# Altium PCB BuckConverterDesign.PcbDoc
Units mm, origin at the board's own origin, x right, y up, seen from the top; angles counter-clockwise.
Board outline 81 x 35 mm, 4 copper layers (Top Layer, IN-1, IN-2, Bottom Layer), stack 0.603 mm thick; 56 components, 37 nets, 210 pads, 46 vias.
Unrouted connection lines stored in the file: 125.
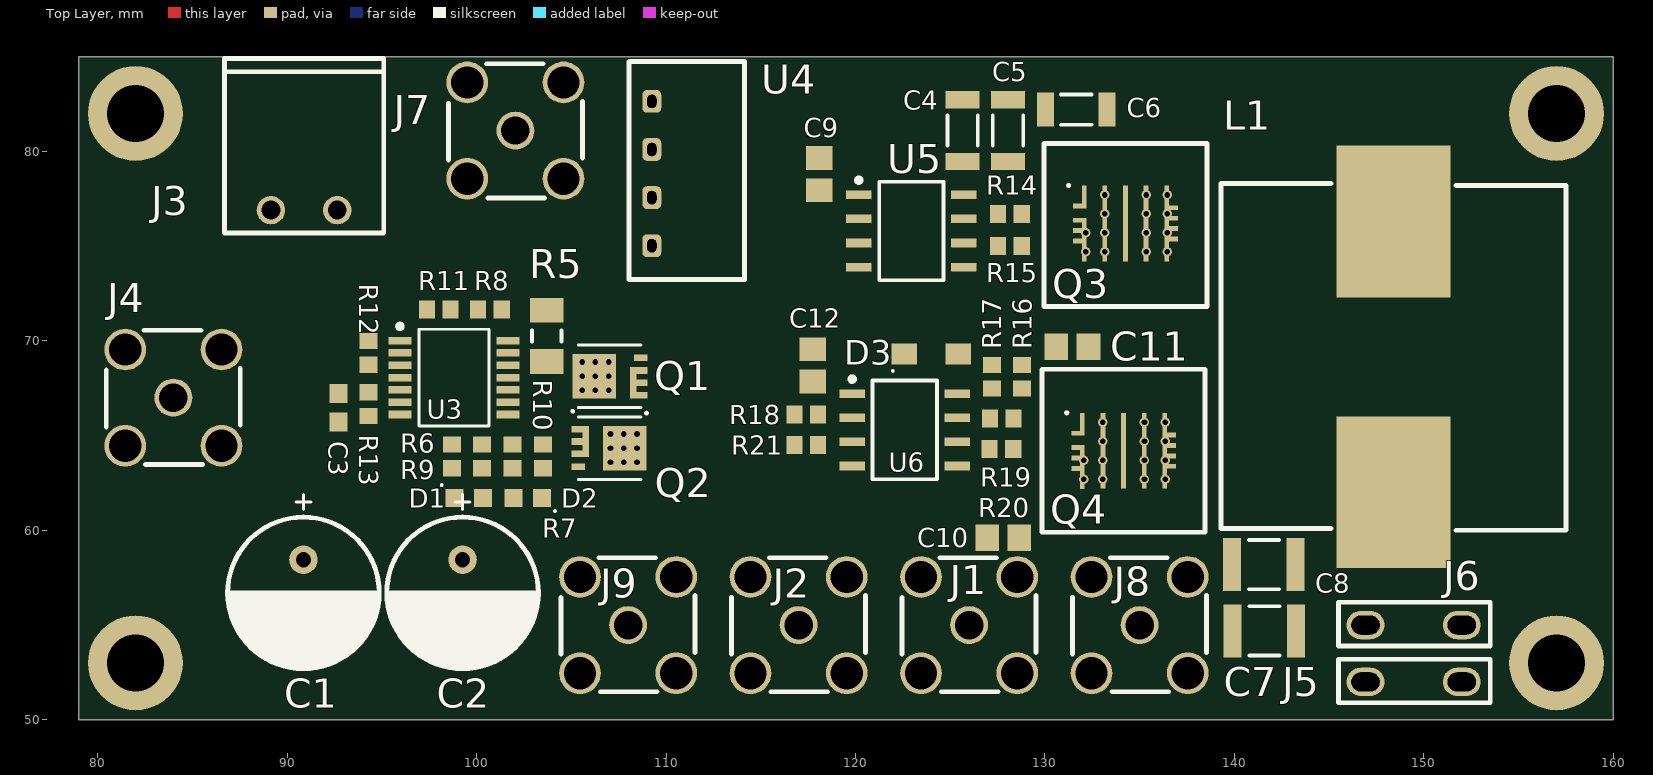
[diagram p0: Top Layer view]
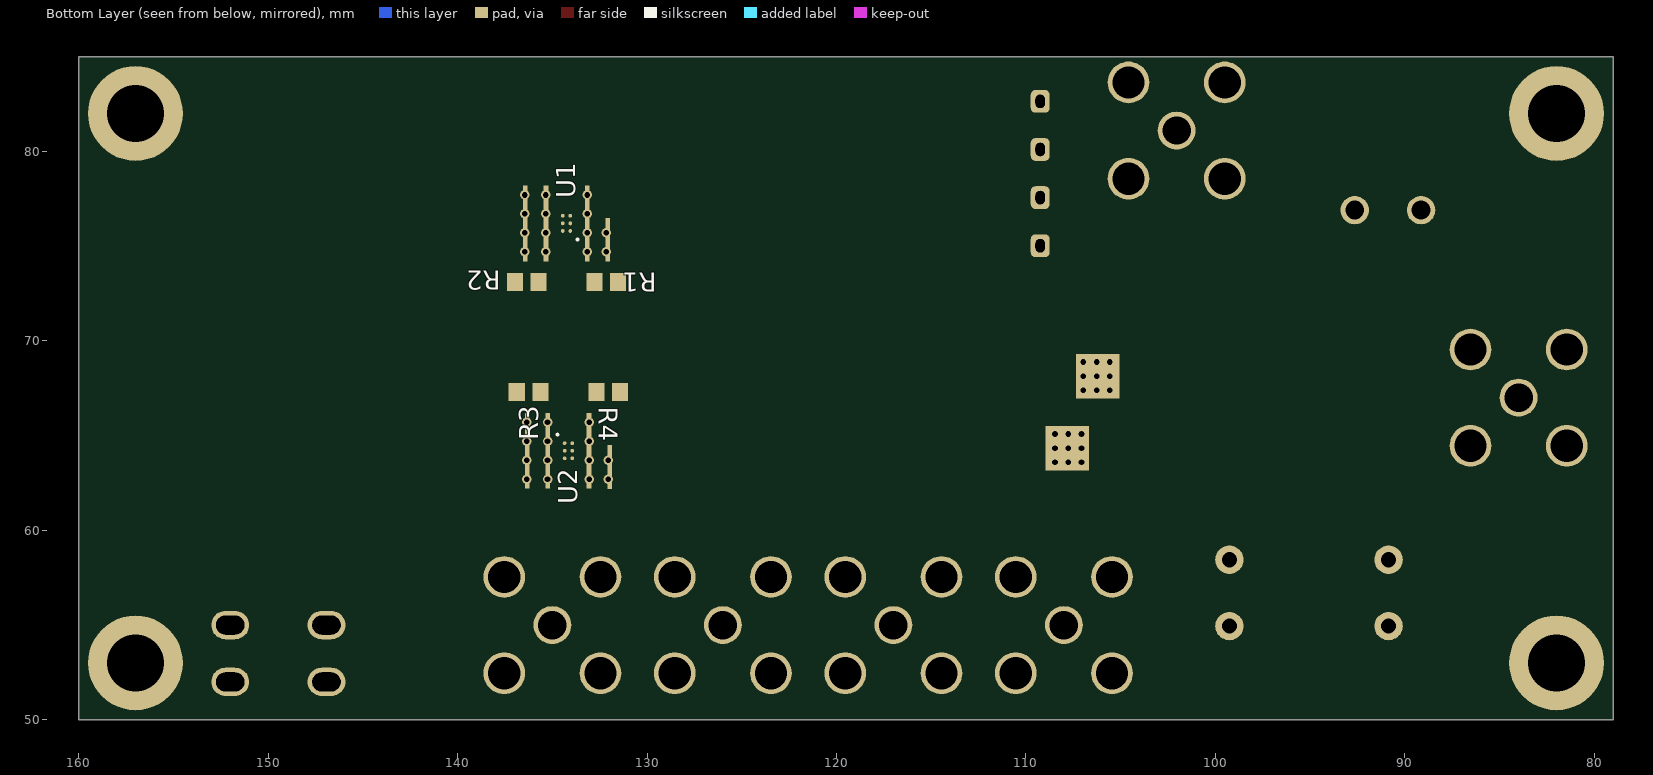
[diagram p1: Bottom Layer view, seen from below]

## Layer stack, top to bottom
Top Solder: solder mask 0.0102, Solder Resist, Dk 3.5
Top Layer: signal copper 0.035
Dielectric 2: prepreg 0.0711, PP-006, Dk 4.1
IN-1: signal copper 0.0356
Dielectric 1: dielectric 0.32, FR-4, Dk 4.8
IN-2: signal copper 0.0356
Dielectric 3: prepreg 0.0711, PP-006, Dk 4.1
Bottom Layer: signal copper 0.035
Bottom Solder: solder mask 0.0102, Solder Resist, Dk 3.5

## Board outline
79,50 160,50 160,85 79,85

## Design rules (kind name [scope] priority, off if disabled: settings)
AssemblyTestPointUsage [All] p1: isadvanced=TRUE
AssemblyTestpoint [All] p1: isadvanced=TRUE testpointundercomponent=TRUE minsize=1.016 maxsize=2.54 preferedsize=1.524 minholesize=0 maxholesize=1.016 preferedholesize=0.813 testpointgrid=0.025 usegrid=TRUE gridtolerance=0 allowsidetop=TRUE allowsidebottom=TRUE
Clearance Clearance_1 [All] p1: isadvanced=TRUE gap=0.15 ignorepadtopadclearanceinfootprint=FALSE
Clearance [All] p2: gap=0.254 ignorepadtopadclearanceinfootprint=FALSE ismatrix=TRUE
ComponentClearance [All] p1: isadvanced=TRUE gap=0.254 collisioncheckmode=3 verticalgap=0.254 showdistances=FALSE
FabricationTestPointUsage [All] p1: isadvanced=TRUE valid=0 allowmultiple=FALSE
FabricationTestpoint [All] p1: isadvanced=TRUE side=3 testpointundercomponent=TRUE minsize=1.016 maxsize=2.54 preferedsize=1.524 minholesize=0 maxholesize=1.016 preferedholesize=0.813 testpointgrid=0.025 allowsidetop=TRUE allowsidebottom=TRUE usegrid=TRUE gridtolerance=0
FanoutControl Fanout_BGA [IsBGA] p1: isadvanced=TRUE bgadir=Out bgaviamode=Centered fanoutstyle=Auto fanoutdirection=Alternating viagrid=0.025 // Fanout_BGA (Default Rule)
FanoutControl Fanout_LCC [IsLCC] p2: isadvanced=TRUE bgadir=Out bgaviamode=Centered fanoutstyle=Auto fanoutdirection=Alternating viagrid=0.025 // Fanout_LCC (Default Rule)
FanoutControl Fanout_SOIC [IsSOIC] p3: isadvanced=TRUE bgadir=Out bgaviamode=Centered fanoutstyle=Auto fanoutdirection=Alternating viagrid=0.025 // Fanout_SOIC (Default Rule)
FanoutControl Fanout_Small [(CompPinCount < 5)] p4: isadvanced=TRUE bgadir=Out bgaviamode=Centered fanoutstyle=Auto fanoutdirection=OutThenIn viagrid=0.025 // Fanout_Small (Default Rule)
FanoutControl Fanout_Default [All] p5: isadvanced=TRUE bgadir=Out bgaviamode=Centered fanoutstyle=Auto fanoutdirection=Alternating viagrid=0.025 // Fanout_Default (Default Rule)
Height [All] p1: isadvanced=TRUE minheight=0 maxheight=25.4 prefheight=12.7
HoleSize [All] p1: isadvanced=TRUE absolutevalues=TRUE maxlimit=20 minlimit=0.3 maxpercent=80.000 minpercent=20.000
HoleToHoleClearance [All] p1: isadvanced=TRUE gap=0.3 allowstackedmicrovias=TRUE
LayerPairs [All] p1: isadvanced=TRUE enforce=TRUE
MinimumSolderMaskSliver [All] p1: isadvanced=TRUE minsoldermaskwidth=0.15
NetAntennae [All] p1: isadvanced=TRUE netantennaetolerance=0
PasteMaskExpansion [All] p1: isadvanced=TRUE expansion=0.1 thpadusetoppaste=TRUE thpadusebottompaste=TRUE
PlaneClearance [All] p1: isadvanced=TRUE clearance=0.508
PlaneConnect [All] p1: isadvanced=TRUE planeconnectstyle=Relief reliefexpansion=0.508 reliefentries=4 reliefconductorwidth=0.254 reliefairgap=0.254
PolygonConnect PolygonConnect_5 [All vs IsNamedPolygon('SW_NODE_L01_P000')] p1: connectstyle=Direct reliefconductorwidth=0.254 reliefentries=4 polygonreliefangle="90 Angle" airgapwidth=0.254
PolygonConnect PolygonConnect_4 [All vs IsNamedPolygon('SW_NODE_L01_P000')] p2: connectstyle=Direct reliefconductorwidth=0.254 reliefentries=4 polygonreliefangle="90 Angle" airgapwidth=0.254
PolygonConnect PolygonConnect_3 [All vs IsNamedPolygon('NONET_L01_P000')] p3: thpad.connectstyle=Direct thpad.reliefconductorwidth=0.254 thpad.reliefentries=4 thpad.polygonreliefangle="90 Angle" thpad.airgapwidth=0.254 smdpad.connectstyle=Direct smdpad.reliefconductorwidth=0.254 smdpad.reliefentries=4 smdpad.polygonreliefangle="90 Angle" smdpad.airgapwidth=0.254 via.connectstyle=Relief via.reliefconductorwidth=0.254 via.reliefentries=4 via.polygonreliefangle="90 Angle" via.airgapwidth=0.254
PolygonConnect PolygonConnect_2 [All vs IsNamedPolygon('NONET_L01_P000')] p4: thpad.connectstyle=Direct thpad.reliefconductorwidth=0.254 thpad.reliefentries=4 thpad.polygonreliefangle="90 Angle" thpad.airgapwidth=0.254 smdpad.connectstyle=Direct smdpad.reliefconductorwidth=0.254 smdpad.reliefentries=4 smdpad.polygonreliefangle="90 Angle" smdpad.airgapwidth=0.254 via.connectstyle=Relief via.reliefconductorwidth=0.254 via.reliefentries=4 via.polygonreliefangle="90 Angle" via.airgapwidth=0.254
PolygonConnect PolygonConnect_1 [All vs IsNamedPolygon('NETQ3_1_L01_P001') Or IsNamedPolygon('NETQ4_1_L01_P002') Or IsNamedPolygon('NONET_L01_P000')] p5: connectstyle=Direct reliefconductorwidth=0.254 reliefentries=4 polygonreliefangle="90 Angle" airgapwidth=0.254
PolygonConnect [All] p6: connectstyle=Relief reliefconductorwidth=0.254 reliefentries=4 polygonreliefangle="90 Angle" airgapwidth=0.254
RoutingCorners [All] p1: isadvanced=TRUE cornerstyle=45-Degree minsetback=2.54 maxsetback=2.54
RoutingPriority [All] p1: isadvanced=TRUE routingpriority=0
RoutingTopology RoutingTopology_1 [All] p1: isadvanced=TRUE topology=Daisy_Balanced
RoutingVias RoutingViaStyle_1 [All] p1: isadvanced=TRUE holewidth=0.3 width=0.5 viastyle="Through Hole" minholewidth=0.3 minwidth=0.5 maxholewidth=10 maxwidth=20
RoutingVias [All] p2: holewidth=0.711 width=1.27 viastyle="Through Hole" minholewidth=0.711 minwidth=1.27 maxholewidth=0.711 maxwidth=1.27
ShortCircuit [All] p1: isadvanced=TRUE allowed=FALSE
SilkToSilkClearance [All] p1: isadvanced=TRUE silktosilkclearance=0.15
SilkToSolderMaskClearance [IsPad] p1: isadvanced=TRUE minsilkscreentomaskgap=0.15 clearancetoexposedcopper=TRUE
SolderMaskExpansion [All] p1: isadvanced=TRUE expansion=0.102 istentingtop=TRUE
SupplyNets "Schematic Supply Nets" [InNet('PGND')] p1: voltage=0.000
SupplyNets "Schematic Supply Nets_12" [InNet('3V3')] p2: voltage=0.000
SupplyNets "Schematic Supply Nets_11" [InNet('VIN')] p3: voltage=0.000
SupplyNets "Schematic Supply Nets_10" [InNet('OUT')] p4: voltage=0.000
SupplyNets "Schematic Supply Nets_9" [InNet('5V')] p5: voltage=0.000
SupplyNets "Schematic Supply Nets_2" [InNet('GND')] p6: voltage=0.000
SupplyNets "Schematic Supply Nets_1" [InNet('SW Node')] p7: voltage=0.000
UnRoutedNet [All] p1: isadvanced=TRUE
UnpouredPolygon [All] p1 off: isadvanced=TRUE
Width MaxMinWidth_1 [All] p1: isadvanced=TRUE maxlimit=10 minlimit=0.15 preferedwidth=0.3 minimp=50.000000 maximp=50.000000 favimp=50.000000
3 further rules are at their usual default settings.

## Classes and differential pairs
component class [03]GateDriver: C9 C10 C11 C12 D3 J7 J8 J9 R14 R15 R16 R17 R18 R19 R20 R21 U4 U5 U6
component class [06]TemperatureSense: J1 J2 R1 R2 R3 R4 U1 U2
component class [05]BuckConverter: C4 C5 C6 C7 C8 J5 J6 L1 Q3 Q4
component class [02]PowerProtections: C1 C2 C3 D1 D2 J3 J4 Q1 Q2 R5 R6 R7 R8 R9 R10 R11 R12 R13 U3

## Components (designator, comment, footprint, x,y, rotation, side; value= is the part's Value field where it differs from the comment)
C1 "AlPolTHT 100 µF 63V 0603 X7R ±10%" 107AVG063MFBJ 90.864,56.695 r270 top
C2 "AlPolTHT 100 µF 63V 0603 X7R ±10%" 107AVG063MFBJ 99.264,56.695 r270 top
C3 "CerSMD 10nF 16V 0603 X7R ±10%" CAPC1608X09N 92.708,66.463 r270 top
C4 "CerSMD 10µF 100V 1210 X6S ±10%" CAPC3216X18N 125.65,81.1 r270 top
C5 "CerSMD 10µF 100V 1210 X6S ±10%" CAPC3216X18N 128.05,81.1 r270 top
C6 "CerSMD 10µF 100V 1210 X6S ±10%" CAPC3216X18N 131.65,82.2 r0 top
C7 "CerSMD 3.3µF 100V 1210 X7S ±10%" CAPC3225X28N 141.585,54.69 r180 top
C8 "CerSMD 3.3µF 100V 1210 X7S ±10%" CAPC3225X28N 141.56,58.19 r180 top
C9 "CerSMD 100nF 16V 0805 X7R ±10%" CAPC2012X09N#1 118.1,78.8 r90 top
C10 "CerSMD 220nF 50V 0805 X7R ±10%" CAPC2012X09N#2 127.8,59.6 r180 top
C11 "CerSMD 2.2 µF 16V 0805 X7R ±10%" CAPC2012X09N#2 131.45,69.7 r0 top
C12 "CerSMD 100nF 16V 0805 X7R ±10%" CAPC2012X09N#2 117.75,68.7 r90 top
D1 "150060VS75000" LED1608X08N 99.6,61.7 r180 top
D2 "150060RS75000" LED1608X08N 102.7,61.7 r0 top
D3 "MBR1H100SFT3G" SODFL360X95-2N 124,69.3 r180 top
J1 "RF2-19A-T-00-50-G" RF2-19A-T-00-50-G#1 123.46,52.46 r0 top
J2 "RF2-19A-T-00-50-G" RF2-19A-T-00-50-G#2 114.46,52.46 r0 top
J3 "1844210" 1844210#1 86.7,75.7 r0 top
J4 "RF2-19A-T-00-50-G" RF2-19A-T-00-50-G#1 81.46,64.46 r0 top
J5 "726386-2" 1844210#2 152,52 r180 top
J6 "726386-2" 1844210#2 152,55 r180 top
J7 "RF2-19A-T-00-50-G" RF2-19A-T-00-50-G#1 104.59,83.64 r180 top
J8 "RF2-19A-T-00-50-G" RF2-19A-T-00-50-G#1 132.46,52.46 r0 top
J9 "RF2-19A-T-00-50-G" RF2-19A-T-00-50-G#1 105.46,52.46 r0 top
L1 "IndSMD Shielded 7.6 µH 20A 20.5 3.75 mOhm" 7443557760 139.3,60.1 r0 top
Q1 "BSZ040N06LS5ATMA1" PG-TSDSON-8-FL 108.671,66.486 r90 top
Q2 "BSZ040N06LS5ATMA1" PG-TSDSON-8-FL 105.371,65.986 r270 top
Q3 "IGC019S06S1XTMA1" IGC019S06S1XTMA1 131.75,77.7 r270 top
Q4 "IGC019S06S1XTMA1" IGC019S06S1XTMA1 131.65,65.7 r270 top
R1 "SMDRes 10K 0603 %1 0.1W" RESC1508X06N#1 132.15,73.1 r180 bottom
R2 "SMDRes 10K 0603 %1 0.1W" RESC1508X06N#1 136.35,73.1 r0 bottom
R3 "SMDRes 10K 0603 %1 0.1W" RESC1508X06N#1 136.25,67.3 r0 bottom
R4 "SMDRes 10K 0603 %1 0.1W" RESC1508X06N#1 132.05,67.3 r180 bottom
R5 "SMDRes 5 mOhm 1206 %1 1W" RESC3116X10N 103.708,70.263 r270 top
R6 "SMDRes 470K 0603 %1 0.1W" RESC1508X06N#1 100.3,63.9 r270 top
R7 "SMDRes 470K 0603 %1 0.1W" RESC1508X06N#1 101.9,63.9 r270 top
R8 "SMDRes 374K 0603 %1 0.1W" RESC1508X06N#1 100.708,71.663 r180 top
R9 "MDRes 330 Ohm 0603 %1 0.1W" RESC1508X06N#2 98.7,63.9 r270 top
R10 "SMDRes 330 Ohm 0603 %1 0.1W" RESC1508X06N#2 103.5,63.9 r270 top
R11 "SMDRes 1.82K 0603 %1 0.1W" RESC1508X06N#1 98.008,71.663 r0 top
R12 "SMDRes 47K 0603 %1 0.1W" RESC1508X06N#1 94.308,69.363 r90 top
R13 "SMDRes 10K 0603 %1 0.1W" RESC1508X06N#1 94.308,66.663 r270 top
R14 "SMDRes 10 Ohm 0603 %1 0.1W" RESC1508X06N#1 128.15,76.7 r0 top
R15 "SMDRes 2 Ohm 0603 %1 0.1W" RESC1508X06N#1 128.15,75 r0 top
R16 "SMDRes 10 Ohm 0603 %1 0.1W" RESC1508X06N#1 128.8,68.1 r90 top
R17 "SMDRes 2.2 Ohm 0603 %1 0.1W" RESC1508X06N#1 127.2,68.1 r90 top
R18 "SMDRes 33 kOhm 0603 %1 0.1W" RESC1508X06N#1 117.4,66.1 r0 top
R19 "SMDRes 10 Ohm 0603 %1 0.1W" RESC1508X06N#1 127.725,65.9 r0 top
R20 "SMDRes 2 Ohm 0603 %1 0.1W" RESC1508X06N#1 127.7,64.3 r0 top
R21 "SMDRes 33 kOhm 0603 %1 0.1W" RESC1508X06N#1 117.4,64.5 r0 top
U1 "TMP119AIYBGR" BGA6C40P2X3_95X149X52 134.25,76.2 r0 bottom
U2 "TMP119AIYBGR" BGA6C40P2X3_95X149X52 134.15,64.2 r180 bottom
U3 "TPS2492PWR" TSOP65P640X120-14L 98.808,68.063 r0 top
U4 "MEE1S0503SC" MEE1S0503SC-Footprint-1 108.05,84.74 r270 top
U5 "1EDB7275FXUMA1" SOIC127P600X175-8N 122.95,75.8 r0 top
U6 "1EDB7275FXUMA1" SOIC127P600X175-8N 122.6,65.3 r0 top

## Footprints (in the part's own frame and the unit in brackets; to place one, negate y for a bottom-side part, rotate by r counter-clockwise, add the part's x,y. Pads: shape width x height; smd on the part's side, far side on the other; paste and mask are expansions set on the pad)
107AVG063MFBJ [mm] "8mm Diameter  13..5mm Height 3.5mm Pitch"
  round 1.5 hole 0.8 mask+0: 1(-1.75,0) 2(1.75,0)
  silkscreen extent -5.2,-4 4,4, body extent -4,-4 4,4, height 13.85
1844210#1 [mm]
  round 1.5 hole 1: 1(2.45,1.2) 2(5.95,1.2)
  silkscreen extent 0,0 8.4,9.2, body extent 0,0 8.4,9.2, height 7.25
1844210#2 [mm]
  oval 2x1.5 hole 1 slot 1.5 at 0 deg: 1(0,0) 1(5.08,0)
  silkscreen extent -1.5,-1.2 6.5,1.1, body extent -1.5,-0.4 6.5,0.4, height 10.1
7443557760 [mm]
  rect 6x8 smd mask+0: 1(9.1,16.2) 2(9.1,1.9)
  silkscreen extent 0,-0.1 18.2,18.2, body extent 0,-0.1 18.2,18.2, height 8.85
BGA6C40P2X3_95X149X52 [mm] "BGA, 6-Leads, Body 0.95x1.49mmx0.53mm, Pitch 0.40mm"
  round 0.2 smd mask+0: A1(-0.2,0.4) A2(0.2,0.4) B1(-0.2,0) B2(0.2,0) C1(-0.2,-0.4) C2(0.2,-0.4)
  silkscreen extent -0.63,0.8 -0.53,0.9, body extent -0.48,-0.74 0.48,0.74, height 0.53
CAPC1608X09N [mm] "Chip Capacitor, 2-Leads, Body 1.60x0.80mm, IPC Medium Density"
  rect 1x0.95 smd mask+0: 1(-0.75,0) 2(0.75,0)
  body extent -0.85,-0.45 0.85,0.45, height 0.9
CAPC2012X09N#1 [mm] "Chip Capacitor, 2-Leads, Body 2.00x1.25mm, IPC Medium Density"
  rect 1.25x1.4 smd mask+0: 1(-0.85,0) 2(0.85,0)
  body extent -1.07,-0.67 1.07,0.67, height 0.9
CAPC2012X09N#2 [mm] "Chip Capacitor, 2-Leads, Body 2.00x1.25mm, IPC Medium Density"
  rect 1.25x1.4 smd: 1(-0.85,0) 2(0.85,0)
  body extent -1.07,-0.67 1.07,0.67, height 0.9
CAPC3216X18N [mm] "Chip Capacitor, 2-Leads, Body 3.20x1.60mm, IPC Medium Density"
  rect 0.9x1.8 smd: 1(-1.625,0) 2(1.625,0)
  silkscreen extent -0.8,-0.8 0.8,0.8, body extent -1.7,-0.9 1.7,0.9, height 1.8
CAPC3225X28N [mm] "Chip Capacitor, 2-Leads, Body 3.20x2.50mm, IPC Medium Density"
  rect 0.95x2.8 smd mask+0: 1(-1.675,0) 2(1.675,0)
  silkscreen extent -0.8,-1.3 0.8,1.3, body extent -1.8,-1.4 1.8,1.4, height 2.8
IGC019S06S1XTMA1 [mm] "PG-TSON-6-2"
  rect 1.2x0.25 smd: 1(0.107,0.325)
  rect 0.25x0.7 smd: 1(0.582,0.09) 5(0.675,4.91) 5(1.225,4.91) 5(1.775,4.91) 5(2.325,4.91) 6(1.332,0.09) 6(1.882,0.09) 6(2.432,0.09)
  rect 4x0.25 smd: 2(1.5,1.412) 3(1.5,2.5) 4(1.5,3.587) 5(1.5,4.675)
  rect 4x0.25 smd far side: 2(1.5,1.412) 4(1.5,3.587) 5(1.5,4.675)
  rect 2.3x0.25 smd: 6(2.357,0.325)
  rect 2.3x0.25 smd far side: 6(2.357,0.325)
  silkscreen extent -0.56,-0.56 -0.44,-0.44, body extent 0,0 3,5, height 1.04
LED1608X08N [mm] "LED, 2-Leads, Body 1.60x0.80mm, IPC Medium Density"
  rect 0.95x0.95 smd: 1(-0.75,0) 2(0.75,0)
  silkscreen extent 1.39,-0.74 1.49,-0.64, body extent -0.85,-0.45 0.85,0.45, height 0.8
MEE1S0503SC-Footprint-1 [mm]
  rrect50% 1.2x1 hole 0.5 slot 0.7 at 0 deg: 1(2.1,1.2) 2(4.64,1.2) 3(7.18,1.2) 4(9.72,1.2)
  silkscreen extent 0,0 11.5,6.1, body extent 0,0 11.48,6.07, height 10.1
PG-TSDSON-8-FL [mm]
  rect 0.35x0.7 smd mask+0: 1(0.65,0) 1(1.3,0) 1(1.95,0) 2(2.625,0)
  rect 1.65x0.35 smd mask+0: 1(1.3,0.4)
  rect 2.35x2.3 smd mask+0: 3(1.65,2.45)
  rect 2.35x2.3 smd far side: 3(1.65,2.45)
  silkscreen extent -0.35,-0.35 3.3,3.3, body extent 0,0 3.3,3.3, height 1.11
RESC1508X06N#1 [mm] "Chip Resistor, 2-Leads, Body 1.55x0.80mm, IPC Medium Density"
  rect 0.85x0.95 smd mask+0: 1(-0.625,0) 2(0.625,0)
  body extent -0.85,-0.48 0.85,0.48, height 0.6
RESC1508X06N#2 [mm] "Chip Resistor, 2-Leads, Body 1.55x0.80mm, IPC Medium Density"
  rect 0.85x0.95 smd: 1(-0.625,0) 2(0.625,0)
  body extent -0.85,-0.48 0.85,0.48, height 0.6
RESC3116X10N [mm] "Chip Resistor, 2-Leads, Body 3.10x1.55mm, IPC Medium Density"
  rect 1.3x1.75 smd mask+0: 1(-1.35,0) 2(1.35,0)
  silkscreen extent -0.3,-0.77 0.3,0.77, body extent -1.65,-0.87 1.65,0.87, height 0.95
RF2-19A-T-00-50-G#1 [mm]
  round 2 hole 1.5: 1(2.54,2.54)
  round 2.2 hole 1.7: Shield(0,0) Shield(0,5.08) Shield(5.08,0) Shield(5.08,5.08)
  silkscreen extent -1,-0.98 6.07,6.1, body extent -0.96,-0.96 6.04,6.04, height 9.6
RF2-19A-T-00-50-G#2 [mm]
  round 2 hole 1.5 mask+0: 1(2.54,2.54)
  round 2.2 hole 1.7: Shield(0,0)
  round 2.2 hole 1.7 mask+0: Shield(0,5.08) Shield(5.08,0) Shield(5.08,5.08)
  silkscreen extent -1,-0.98 6.07,6.1, body extent -0.96,-0.96 6.04,6.04, height 9.6
SODFL360X95-2N [mm] "SODFL, 2-Leads, Body 1.65x3.60mm, IPC Medium Density"
  rect 1.35x1.1 smd mask+0: 1(-1.425,0) 2(1.425,0)
  silkscreen extent 1.98,0.84 2.08,0.94, body extent -1.8,-0.9 1.8,0.9, height 0.95
SOIC127P600X175-8N [mm] "SOIC, 8-Leads, Body 5.00x4.00mm, Pitch 1.27mm, IPC Medium Density"
  rect 1.35x0.45 smd mask+0: 1(-2.775,1.905) 2(-2.775,0.635) 3(-2.775,-0.635) 4(-2.775,-1.905) 5(2.775,-1.905) 6(2.775,-0.635) 7(2.775,0.635) 8(2.775,1.905)
  silkscreen extent -2.9,-2.6 1.7,2.8, body extent -3,-2.6 3,2.6, height 1.75
TSOP65P640X120-14L [mm] "TSOP, 14-Leads, Body 5.00x4.40mm, Pitch 0.65mm, IPC High Density"
  rect 1.2x0.4 smd: 1(-2.85,1.95) 2(-2.85,1.3) 3(-2.85,0.65) 4(-2.85,0) 5(-2.85,-0.65) 6(-2.85,-1.3) 7(-2.85,-1.95) 8(2.85,-1.95) 9(2.85,-1.3) 10(2.85,-0.65) 11(2.85,0) 12(2.85,0.65) 13(2.85,1.3) 14(2.85,1.95)
  silkscreen extent -2.97,-2.55 1.85,2.82, body extent -3.2,-2.5 3.2,2.5, height 1.21

## Part data
C1 C2: library part CMP-00002-4, "Ceramic Capacitor SMD 100 µF 63V 0603 X7R ±10%", Digi-Key Part Number=1572-1656-ND, Manufacturer="Cornell Dubilier Knowles", Manufacturer Number=107AVG063MFBJ, Mouser Part Number=598-107AVG063MFBJ, Package=0603, Temperature="-55°C up to 125°C", Temperature Coefficient=X7R, Tolerance=±10%, Voltage=63V, Mounting Type="Surface Mount"
C3: library part CMP-00001-3, "Ceramic Capacitor SMD  10nF 16V 0603 X7R ±10%", Digi-Key Part Number=1276-CL10B103KO8WPNCCT-ND, Manufacturer="Samsung Electro-Mechanics", Manufacturer Number=CL10B103KO8WPNC, Mouser Part Number=187-CL10B103KO8WPNC, Package=0603, Temperature="-55°C up to 125°C", Temperature Coefficient=X7R, Tolerance=±10%, Voltage=16V, Mounting Type="Surface Mount"
C4 C5 C6: library part CMP-000078-1, "Ceramic Capacitor SMD 10µF 100V 1210 X6S ±10%", Digi-Key Part Number=C3216X6S2A106K160AC, Manufacturer="TDK Corporation", Mouser Part Number=810-C3216X6S2A106K16, Package=0603, Temperature="-55°C up to 125°C", Temperature Coefficient=X7R, Tolerance=±10%, Voltage=16V, Farnell Number=4066660, Manufacturer Number=C3216X6S2A106K160AC, Mounting Type="Surface Mount"
C7 C8: library part CMP-00010-1, "Ceramic Capacitor SMD 3.3µF 100V 1210 X7S ±10%", Digi-Key Part Number=445-5209-1-ND, Manufacturer="Samsung Electro-Mechanics", Manufacturer Number=C3225X7S2A335K200AB, Mouser Part Number=810-C3225X7S2A335K, Package=0603, Temperature="-55°C up to 125°C", Temperature Coefficient=X7R, Tolerance=±10%, Voltage=16V, Farnell Number=2476113, Mounting Type="Surface Mount"
C9 C12: library part CMP-00013-1, "Ceramic Capacitor SMD 100nF 10V 0805 X7R ±10%", Digi-Key Part Number=732-8026-1-ND, Farnell Part Number=2534051, Manufacturer="Würth Elektronik", Manufacturer Number=885012207016, Mouser Part Number=710-885012207016, Package=0603, Temperature="-55°C up to 125°C", Temperature Coefficient=X7R, Tolerance=±10%, Voltage=10V, Mounting Type="Surface Mount"
C10: library part CMP-00016-1, "Ceramic Capacitor SMD 220nF 50V 0805 X7R ±10%", Digi-Key Part Number=490-1670-1-ND, Manufacturer="Murata Electronics", Manufacturer Number=GRM21BR71H224KA01L, Mouser Part Number=81-GRM40X7R224K050AL, Package=0805, Temperature="-55°C up to 125°C", Temperature Coefficient=X7R, Tolerance=±10%, Voltage=10V, Mounting Type="Surface Mount"
C11: library part CMP-00014-1, "Ceramic Capacitor SMD 2.2 µF 16V 0805 X7R ±10%", Digi-Key Part Number=445-1420-1-ND, Farnell Part Number=1907345, Manufacturer="TDK Corporation", Manufacturer Number=C2012X7R1C225K125AB, Mouser Part Number=810-C2012X7R1C225K, Package=0805, Temperature="-55°C up to 125°C", Temperature Coefficient=X7R, Tolerance=±10%, Voltage=16V, Mounting Type="Surface Mount"
D1: library part CMP-00028-1, "GREEN LED 0603"
D2: library part CMP-00024-1, "RED LED 0603"
D3: library part CMP-00020-2
J1 J2 J4 J7 J8 J9: library part CMP-00025-2, "Rf Sma Connector"
J3: library part CMP-00023-1, "12A 2-Pos, Right Angle"
J5 J6: library part CMP-00026-1
L1: library part CMP-00011-1, "Inductor SMD Shielded 7.6 µH 20A 20.5 3.75 mOhm"
Q1 Q2: library part CMP-00004-1, "N-MOS 60V 17A (Ta) 101A (Tc)"
Q3 Q4: library part CMP-00009-5, "GaNFET N-Ch - 60V - 27A (Ta), 99A (Tc)", Digi-Key Part Number=448-IGC019S06S1XTMA1CT-ND, Drive Voltage=5V, Farnell Part Number=4680815, Manufacturer="Infineon Technologies", Mouser Part Number=726-IGC019S06S1XTMA1, Operating Temperature="-40°C up to 150°C (TJ)", Package=PG-TSON-6-2, FET Type=N-Channel, Ids="27A (Ta), 99A (Tc)", Manufacturer Number=IGC019S06S1XTMA1, Mounting Type="Surface Mount", Rdson=1.9mOhm, Vdss=60V, Vgs(max)=±6.5V, Vgs(th)=2.9V
R1 R2 R3 R4: library part CMP-00001-1-2, "Res Thick Film 0603 10K Ohm 1% 0.1W(1/10W) ±100ppm/C Pad SMD T/R Automotive AEC-Q200", Digi-Key Part Number=RMCF0603FT10K0CT-ND, Manufacturer="Stackpole Electronics Inc", Manufacturer Number=RMCF0603FT10K0, Mouser Part Number=708-RMCF0603FT10K0, Package=0603, Power=0.1W, Temperature="-55°C up to 155°C", Tolerance=±1%, Mounting Type="Surface Mount"
R5: library part CMP-00007-2, "5 mOhms ±1% 1W Chip Resistor 1206 (3216 Metric) Automotive AEC-Q200, Current Sense, Moisture Resistant Metal Foil", Digi-Key Part Number=CSRF1206FT5L00CT-ND, Manufacturer="Stackpole Electronics Inc", Manufacturer Number=CSRF1206FT5L00, Mouser Part Number=708-CSRF1206FT5L00, Package=1206, Power=1W, Temperature="-55°C up to 170°C", Tolerance=±1%, Mounting Type="Surface Mount"
R6 R7: library part CMP-00006-1, "Res Thick Film 0603 470K Ohm 1% 0.1W(1/10W) ±100ppm/C Pad SMD T/R Automotive AEC-Q200", Digi-Key Part Number=RMCF0603FT470KCT-ND, Manufacturer="Stackpole Electronics Inc", Manufacturer Number=RMCF0603FT470K, Mouser Part Number=708-RMCF0603FT470K, Package=0603, Power=0.1W, Temperature="-55°C up to 155°C", Tolerance=±1%, Mounting Type="Surface Mount"
R8: library part CMP-00005-2, "Res Thick Film 0603 374K Ohm 1% 0.1W(1/10W) ±100ppm/C Pad SMD T/R Automotive AEC-Q200", Digi-Key Part Number=RMCF0603FT374KCT-ND, Manufacturer="Stackpole Electronics Inc", Manufacturer Number=RMCF0603FT374K, Mouser Part Number=708-RMCF0603FT374K, Package=0603, Power=0.1W, Temperature="-55°C up to 155°C", Tolerance=±1%, Mounting Type="Surface Mount"
R9 R10: library part CMP-00027-1, "Res Thick Film 0603 33 kOhm Ohm 1% 0.1W(1/10W) ±100ppm/C Pad SMD T/R Automotive AEC-Q200", Digi-Key Part Number=RMCF0603FT330RCT-ND, Manufacturer="Stackpole Electronics Inc", Manufacturer Number=RMCF0603FT330R, Mouser Part Number=708-RMCF0603FT330R, Package=0603, Power=0.1W, Temperature="-55°C up to 155°C", Tolerance=±1%, Mounting Type="Surface Mount"
R11: library part CMP-00003-2, "Res Thick Film 0603 1.82K Ohm 1% 0.1W(1/10W) ±100ppm/C Pad SMD T/R Automotive AEC-Q200", Digi-Key Part Number=RMCF0603FT1K82CT-ND, Manufacturer="Stackpole Electronics Inc", Manufacturer Number=RMCF0603FT1K82, Mouser Part Number=708-RMCF0603FT1K82, Package=0603, Power=0.1W, Temperature="-55°C up to 155°C", Tolerance=±1%, Mounting Type="Surface Mount"
R12: library part CMP-00008-1, "Res Thick Film 0603 47K Ohm 1% 0.1W(1/10W) ±100ppm/C Pad SMD T/R Automotive AEC-Q200", Digi-Key Part Number=RMCF0603FT47K0CT-ND, Manufacturer="Stackpole Electronics Inc", Manufacturer Number=RMCF0603FT47K0, Mouser Part Number=708-RMCF0603FT47K0, Package=0603, Power=0.1W, Temperature="-55°C up to 155°C", Tolerance=±1%, Mounting Type="Surface Mount"
R13: library part CMP-00001-1-1, "Res Thick Film 0603 10K Ohm 1% 0.1W(1/10W) ±100ppm/C Pad SMD T/R Automotive AEC-Q200", Digi-Key Part Number=RMCF0603FT10K0CT-ND, Manufacturer="Stackpole Electronics Inc", Manufacturer Number=RMCF0603FT10K0, Mouser Part Number=708-RMCF0603FT10K0, Package=0603, Power=0.1W, Temperature="-55°C up to 155°C", Tolerance=±1%, Mounting Type="Surface Mount"
R14 R16 R19: library part CMP-00017-1, "Res Thick Film 0603 10 Ohm Ohm 1% 0.1W(1/10W) ±100ppm/C Pad SMD T/R Automotive AEC-Q200", Digi-Key Part Number=RMCF0603FT10R0CT-ND, Manufacturer="Stackpole Electronics Inc", Manufacturer Number=RMCF0603FT10R0, Mouser Part Number=708-RMCF0603FT10R0, Package=0603, Power=0.1W, Temperature="-55°C up to 155°C", Tolerance=±1%, Mounting Type="Surface Mount"
R15 R20: library part CMP-00019-1, "Res Thick Film 0603 2 Ohm Ohm 1% 0.1W(1/10W) ±100ppm/C Pad SMD T/R Automotive AEC-Q200", Digi-Key Part Number=RMCF0603FT2R00CT-ND, Manufacturer="Stackpole Electronics Inc", Manufacturer Number=RMCF0603FT2R00, Mouser Part Number=708-RMCF0603FT2R00, Package=0603, Power=0.1W, Temperature="-55°C up to 155°C", Tolerance=±1%, Mounting Type="Surface Mount"
R17: library part CMP-00015-1, "Res Thick Film 0603 2.2 Ohm Ohm 1% 0.1W(1/10W) ±100ppm/C Pad SMD T/R Automotive AEC-Q200", Digi-Key Part Number=RMCF0603FT2R20CT-ND, Manufacturer="Stackpole Electronics Inc", Manufacturer Number=RMCF0603FT2R20, Mouser Part Number=708-RMCF0603FT2R20, Package=0603, Power=0.1W, Temperature="-55°C up to 155°C", Tolerance=±1%, Mounting Type="Surface Mount"
R18 R21: library part CMP-00018-1, "Res Thick Film 0603 33 kOhm Ohm 1% 0.1W(1/10W) ±100ppm/C Pad SMD T/R Automotive AEC-Q200", Digi-Key Part Number=RMCF0603FT33K0CT-ND, Manufacturer="Stackpole Electronics Inc", Manufacturer Number=RMCF0603FT33K0, Mouser Part Number=708-RMCF0603FT33K0, Package=0603, Power=0.1W, Temperature="-55°C up to 155°C", Tolerance=±1%, Mounting Type="Surface Mount"
U1 U2: library part CMP-00021-1, "Temperature Sensor"
U3: library part CMP-00000-2, "eFuses - External MOSFETs - 9V-80V", Digi-Key Part Number=296-39373-1-ND, Manufacturer="Texas Instruments", Mouser Part Number=595-TPS2492PWR, Package=14-TSSOP, Temperature Rating="-40°C up to 125°C", Voltage Rating="9V up to 80V", Features="Adjustable Current Limit, Adjustable Soft Start, Current Monitoring, Fault Output, Overcurrent Protection, Overvoltage Protection, Power Good Signal, Short Circuit Protection, Adjustable UVLO", Internal Switch(s)=No, Manufacturer Number=TPS2492PWR, Mount Type="Surface Mount"
U4: library part CMP-00029-1, "Murata Power - 5V to 3.3V Isolated DC-DC Converter 1W"
U5 U6: library part CMP-00012-1

## Free pads (board coordinates)
  round 5 hole 3 unplated: 0(82,53) 0(82,82) 0(157,53) 0(157,82)

## Via types
v1: diameter 0.5, hole 0.3, Top Layer to Bottom Layer, tented both sides, 46 vias

## Nets (pads, with @x,y where several pads share a name; then routed paths per layer and width w, separated by ;. In a path a pad name is that pad's centre, name@x,y a point inside that pad or via, vN(x,y) a via of type N, cw(c..) or ccw(c..) an arc to the next point about the centre after c; other vN are vias at no path point)
3V3: C9.1 C12.1 D1.1 D2.1 R1.2 R2.2 R3.2 R4.2 R6.2 R7.2 R16.2 U1.B1 U2.B1 U4.4 U5.1 U6.1
5V: C10.1 D3.2 J7.1 U4.2 U5.8
GND: C1.2 C2.2 C3.2 C9.2 C12.2 J1.Shield J2.Shield J3.1 J4.Shield J8.Shield J9.Shield R13.2 U1.B2 U1.C1 U2.B2 U2.C1 U3.7 U4.3 U5.4 U6.4
NetC3_1: C3.1 U3.4
NetC11_1: C11.1 R16.1 R17.1 U6.8
NetD1_2: D1.2 R9.2
NetD2_2: D2.2 R10.2
NetD3_1: D3.1 R17.2
NetJ1_1: J1.1 R2.1 R4.1 U1.A2 U2.A2
NetJ2_1: J2.1 R1.1 R3.1 U1.A1 U2.A1
NetJ3_2: J3.2 R5.1 R8.1 U3.14
NetJ4_1: J4.1 U3.6
NetJ8_1: J8.1 R21.1 U5.2
NetJ9_1: J9.1 R18.1 U5.3
NetQ1_1: Q1.1 Q2.1 U3.11
NetQ1_2: Q1.2 Q2.2 U3.12
NetQ1_3: Q1.3 R5.2 U3.13
  other v1: 105.571,67.386 106.271,67.386 106.971,67.386 105.571,68.136 106.271,68.136 106.971,68.136 105.571,68.886 106.271,68.886 106.971,68.886
NetQ3_1: Q3.1@131.84,77.118 R14.2 R15.2
NetQ4_1: R19.2 R20.2
NetR6_1: R6.1 R9.1 U3.8
NetR7_1: R7.1 R10.1 U3.9
NetR8_2: R8.2 R11.2 U3.1
NetR11_1: R11.1 R13.1 U3.5
NetR12_1: R12.1 U3.3
NetR12_2: R12.2 U3.2
NetR14_1: R14.1 U5.7
NetR15_1: R15.1 U5.6
NetR18_2: R18.2 U6.2
NetR19_1: R19.1 U6.7
NetR20_1: R20.1 U6.6
NetR21_2: R21.2 U6.3
NetU1_C2: U1.C2
NetU2_C2: U2.C2
OUT: C7.1 C8.1 J5.1 L1.2
PGND: C4.2 C5.2 C6.2 C7.2 C8.2 C11.2 J6.1 J7.Shield U4.1 U6.5
"SW Node": C10.2 L1.1 U5.5
VIN: C1.1 C2.1 C4.1 C5.1 C6.1 Q2.3
  other v1: 107.071,63.586 107.771,63.586 108.471,63.586 107.071,64.336 107.771,64.336 108.471,64.336 107.071,65.086 107.771,65.086 108.471,65.086
pads on no net: Q3.1@132.075,77.593 Q3.2 Q3.3 Q3.4 Q3.5 Q3.6 Q4.1 Q4.2 Q4.3 Q4.4 Q4.5 Q4.6 U3.10
copper on no net:
  other v1: 132.05,62.7 133.05,62.7 135.25,62.7 136.35,62.7 132.05,63.7 133.05,63.7 135.25,63.7 136.35,63.7 133.05,64.7 135.25,64.7 136.35,64.7 133.05,65.7 135.25,65.7 136.35,65.7 132.15,74.7 133.15,74.7 135.35,74.7 136.45,74.7 132.15,75.7 133.15,75.7 135.35,75.7 136.45,75.7 133.15,76.7 135.35,76.7 136.45,76.7 133.15,77.7 135.35,77.7 136.45,77.7

## Silkscreen, mask and mechanical layers (free items; w line width, h text height)
Top Overlay:
  lines w0.254: 129.85,63.894 129.85,68.5 133.85,68.5 ; 129.85,63.9 129.85,59.9 133.85,59.9 ; 129.95,75.811 129.95,80.417 133.95,80.417 ; 129.95,75.817 129.95,71.817 133.95,71.817 ; 133.844,59.9 138.45,59.9 138.45,64.506 ; 133.844,68.5 138.45,68.5 138.45,64.5 ; 133.944,71.817 138.55,71.817 138.55,76.422 ; 133.944,80.417 138.55,80.417 138.55,76.417